# Altium PCB Arduino MEGA blank shield.pcbdoc
Units mm, origin at the board's own origin, x right, y up, seen from the top; angles counter-clockwise.
Board outline 100 x 115 mm, 2 copper layers (Top Layer, Bottom Layer); 11 components, 77 nets, 138 pads, 7 vias.
Unrouted connection lines stored in the file: 10.
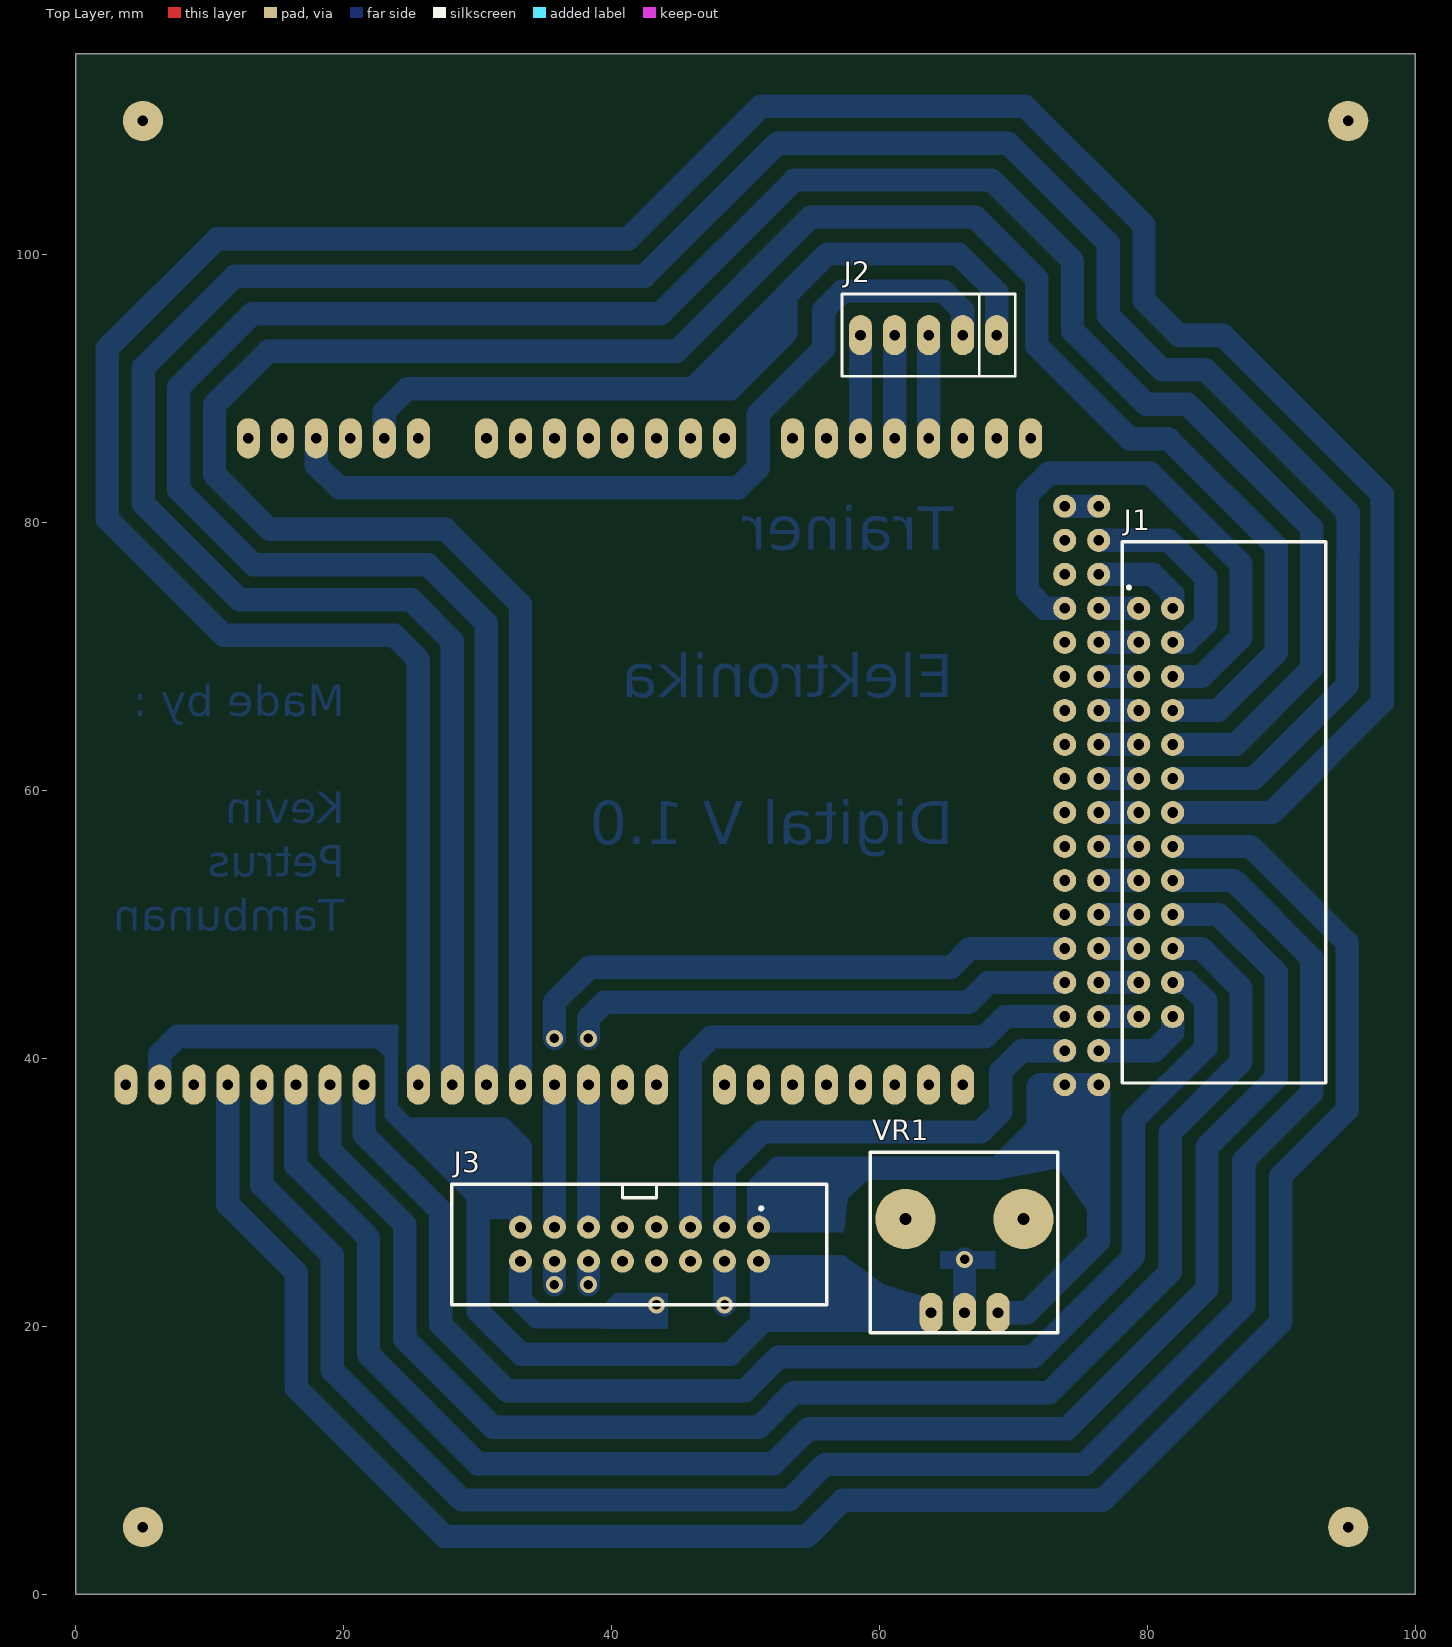
[diagram p0: Top Layer view]
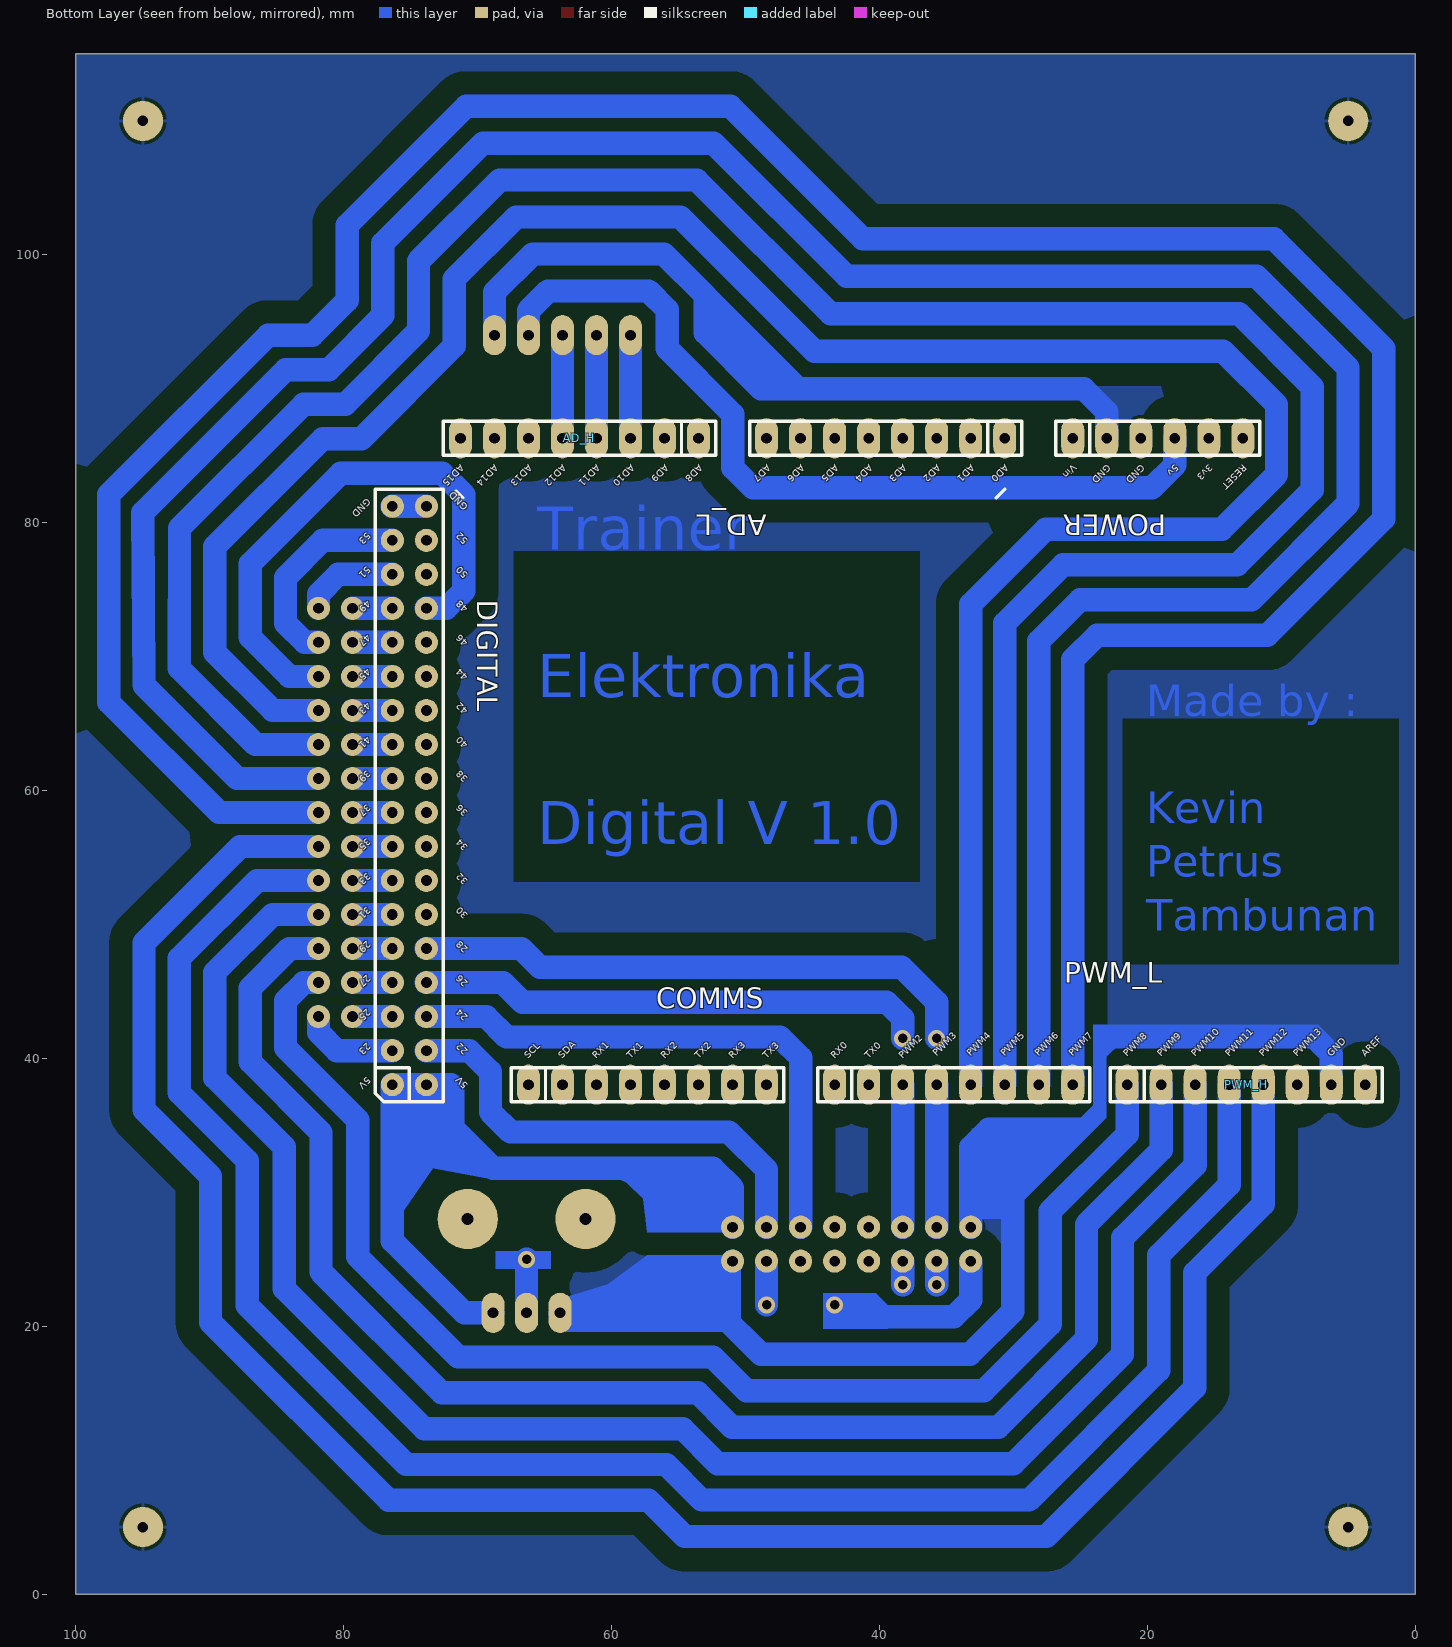
[diagram p1: Bottom Layer view, seen from below]
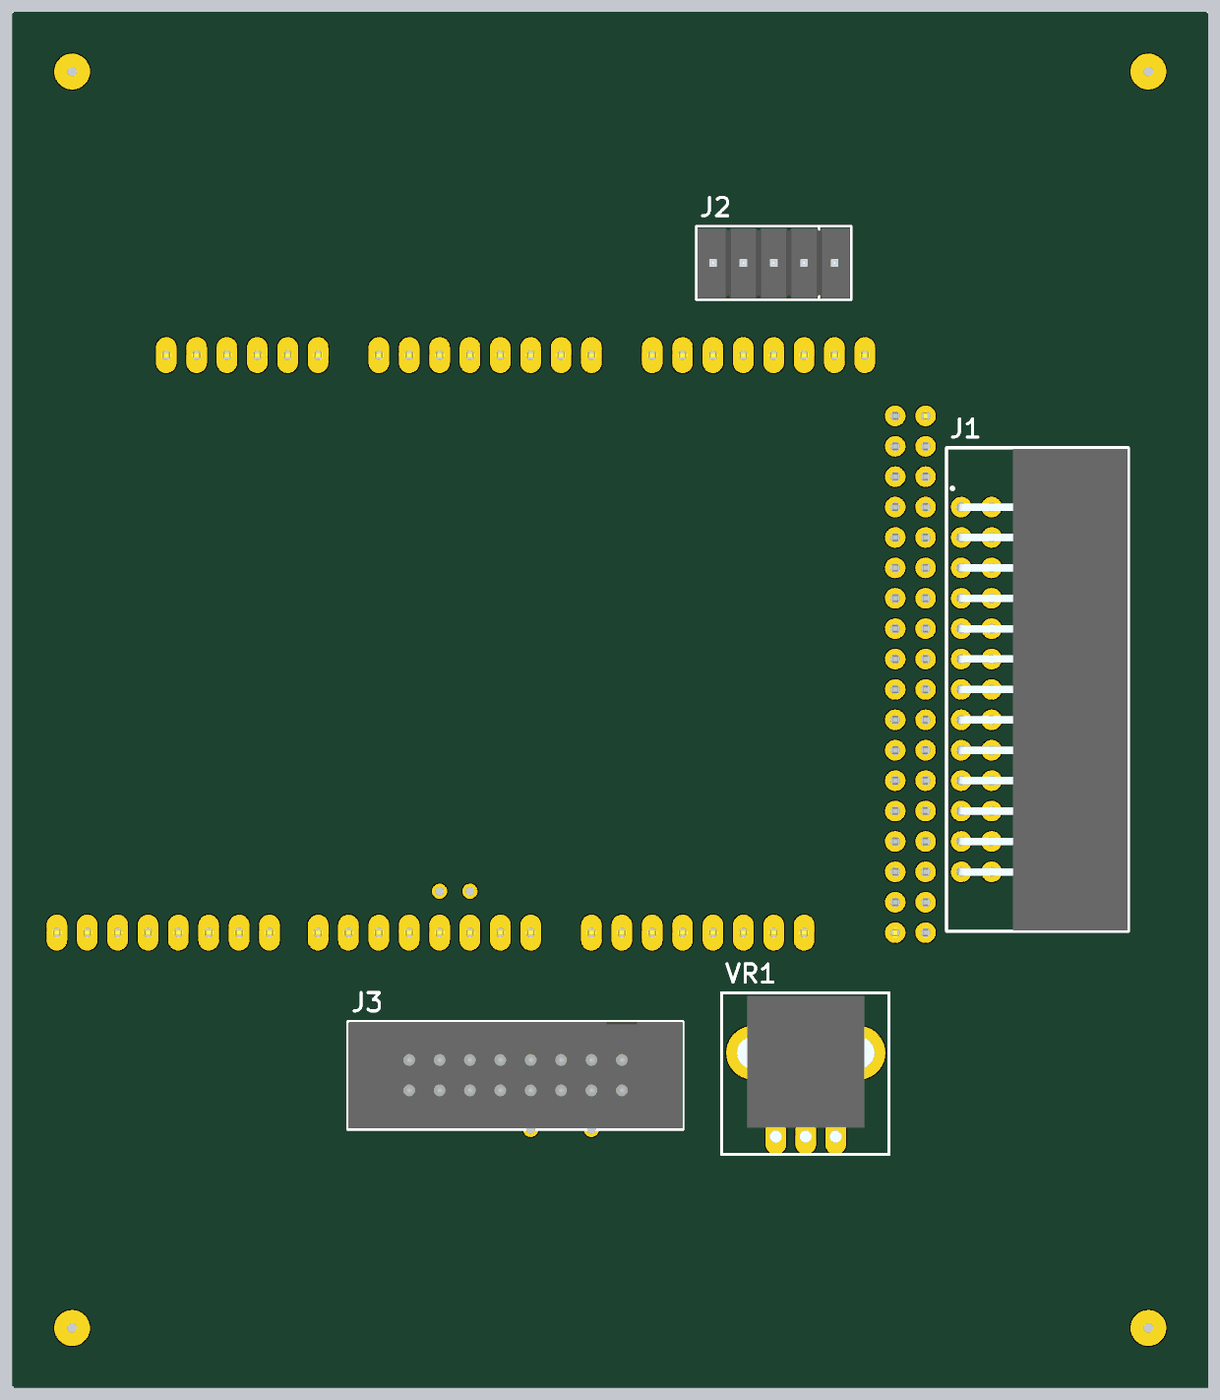
[diagram p2: 3D render of the assembled board from above, using the file's embedded part models]
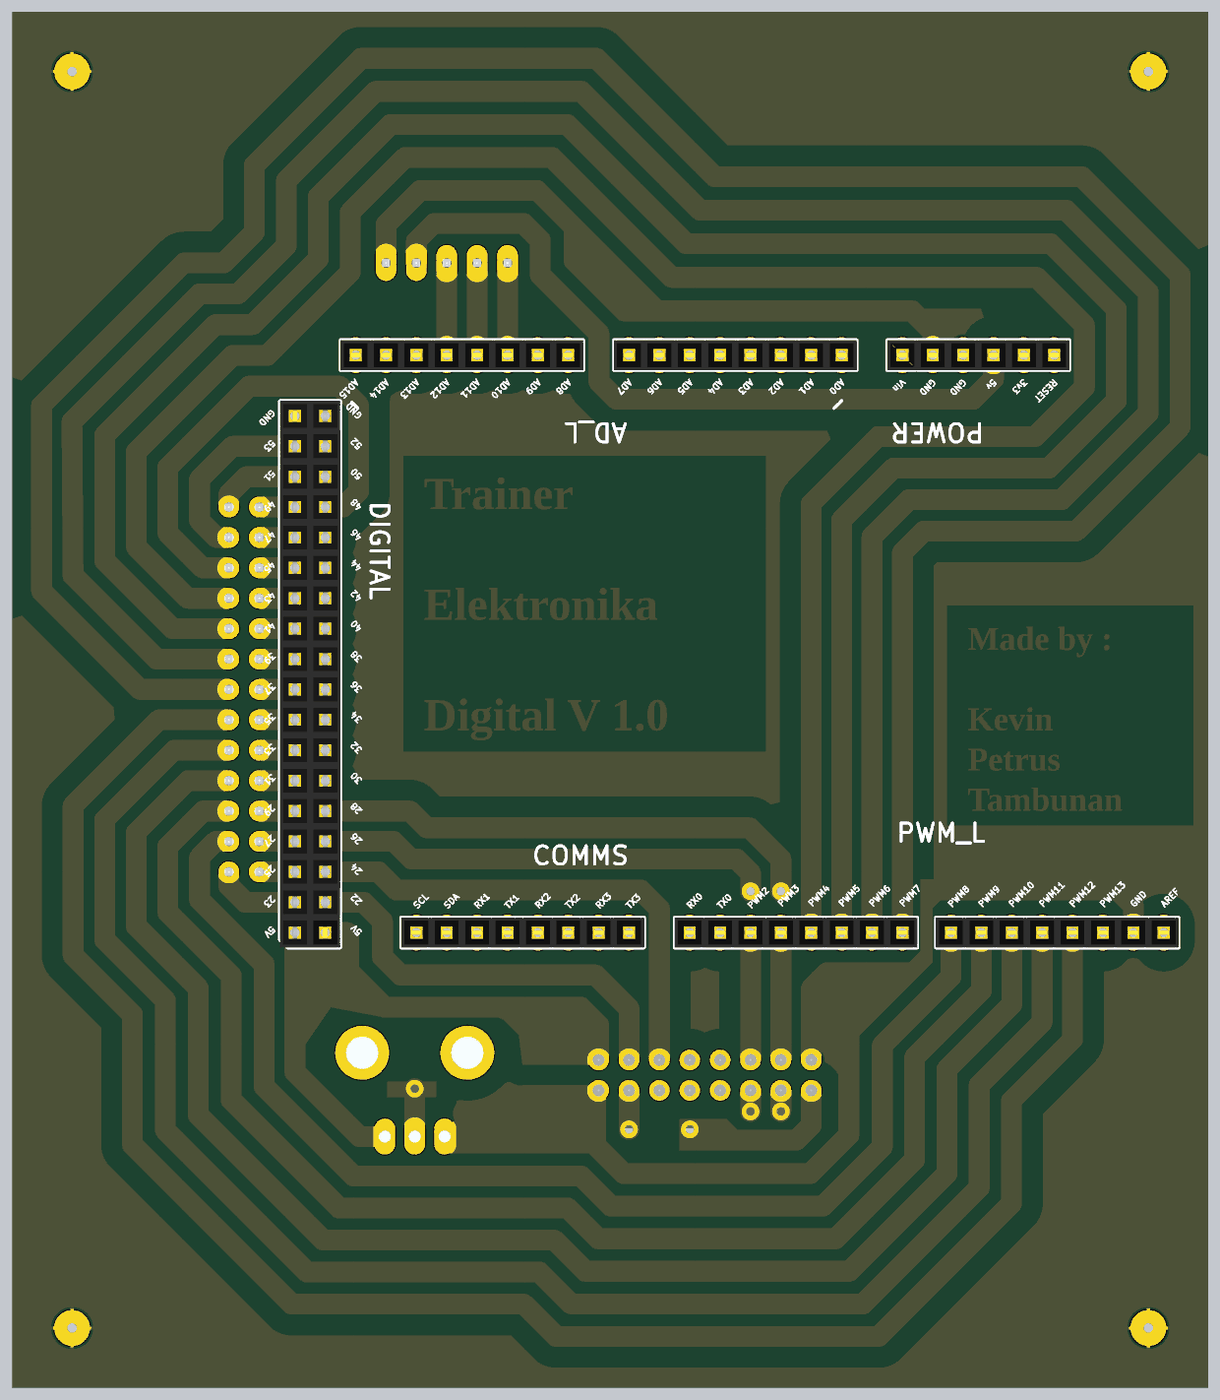
[diagram p3: 3D render of the assembled board from below, using the file's embedded part models]

## Layer stack, top to bottom
Top Solder: solder mask 0.0102, Solder Resist, Dk 3.5
Top Layer: signal copper 0.0356
Dielectric1: dielectric 0.32, FR-4, Dk 4.8
Bottom Layer: signal copper 0.0356
Bottom Solder: solder mask 0.0102, Solder Resist, Dk 3.5

## Board outline
0,0 0,115 100,115 100,0

## Design rules (kind name [scope] priority, off if disabled: settings)
Clearance [All] p1: gap=1.75 ignorepadtopadclearanceinfootprint=FALSE
PolygonConnect [All] p1: connectstyle=Relief reliefconductorwidth=0.254 reliefentries=4 polygonreliefangle="90 Angle" airgapwidth=0.254
RoutingVias [All] p1: holewidth=0.711 width=1.27 viastyle="Through Hole" minholewidth=0.711 minwidth=1.27 maxholewidth=0.711 maxwidth=1.27
SilkToSolderMaskClearance SilkscreenOverComponentPads [IsPad] p1: minsilkscreentomaskgap=0.254 clearancetoexposedcopper=TRUE
SolderMaskExpansion [All] p1: expansion=0.102
Width [All] p1: maxlimit=0.254 minlimit=0.254 preferedwidth=0.254
29 further rules are at their usual default settings.

## Components (designator, comment, footprint, x,y, rotation, side; value= is the part's Value field where it differs from the comment)
AD_H "AD_H" "HEADER 8X1 8.5MM" 53.51,86.3 r0 bottom locked
AD_L "AD_L" "HEADER 8X1 8.5MM" 30.65,86.3 r0 bottom locked
COMMS "Communication" "HEADER 8X1 8.5MM" 66.21,38.04 r180 bottom locked
DIGITAL "IO_36" "HEADER 36X 8MM" 76.37,38.04 r90 bottom locked
J1 "CONNECTOR_IO" SHDRRA26W62P254_2X13_4023X957X920P 80.62,58.36 r270 top locked
J2 "Rotary Encoder" HDRV5W64P0X254_1X5_1270X580X1205P 63.67,94 r0 top locked
J3 "LCD2002A_CONNECTOR" SHDR16W99P254_2X8_2794X889X947P 42.08,26.13 r180 top locked
POWER "POWER" "HEADER 6X1 8.5MM" 25.57,86.3 r180 bottom locked
PWM_H "PWM_H" "HEADER 8X1 8.5MM" 21.506,38.04 r180 bottom locked
PWM_L "PWM_L" "HEADER 8X1 8.5MM" 43.35,38.04 r180 bottom locked
VR1 "POT-5K" RV09AF4020KB10K 66.35,24.5 r0 top

## Footprints (in the part's own frame and the unit in brackets; to place one, negate y for a bottom-side part, rotate by r counter-clockwise, add the part's x,y. Pads: shape width x height; smd on the part's side, far side on the other; paste and mask are expansions set on the pad)
HDRV5W64P0X254_1X5_1270X580X1205P [mm]
  oval 1.72x3 hole 0.8: 1(5.08,0) 2(2.54,0) 3(0,0) 4(-2.54,0) 5(-5.08,0)
  silkscreen extent -6.48,-3.08 6.48,3.08, body extent -6.35,-2.9 6.35,2.9, height 12.05
"HEADER 6X1 8.5MM" [mm] "Stackable 6 pin header"
  oval 1.72x3 hole 0.8: 1(0,0) 2(2.54,0) 3(5.08,0) 4(7.62,0) 5(10.16,0) 6(12.7,0)
  silkscreen extent -1.27,-1.27 13.97,1.27, body extent -1.27,-1.27 13.97,1.27, height 8.5
"HEADER 8X1 8.5MM" [mm] "Stackable 8 pin header"
  oval 1.72x3 hole 0.8: 1(0,0) 2(2.54,0) 3(5.08,0) 4(7.62,0) 5(10.16,0) 6(12.7,0) 7(15.24,0) 8(17.78,0)
  silkscreen extent -1.27,-1.27 19.05,1.27, body extent -1.27,-1.27 19.05,1.27, height 8.5
"HEADER 36X 8MM" [mm] "Stackable 10 pin header"
  round 1.72 hole 0.8: 1(0,0) 2(0,-2.54) 3(2.54,0) 4(2.54,-2.54) 5(5.08,0) 6(5.08,-2.54) 7(7.62,0) 8(7.62,-2.54) 9(10.16,0) 10(10.16,-2.54) 11(12.7,0) 12(12.7,-2.54) 13(15.24,0) 14(15.24,-2.54) 15(17.78,0) 16(17.78,-2.54) 17(20.32,0) 18(20.32,-2.54) 19(22.86,-2.54) 20(22.86,0) 21(25.4,0) 22(25.4,-2.54) 23(27.94,0) 24(27.94,-2.54) 25(30.48,0) 26(30.48,-2.54) 27(33.02,0) 28(33.02,-2.54) 29(35.56,0) 30(35.56,-2.54) 31(38.1,0) 32(38.1,-2.54) 33(40.64,0) 34(40.64,-2.54) 35(43.18,0) 36(43.18,-2.54)
  silkscreen extent -1.27,-3.81 44.45,1.27, body extent -1.27,-3.81 44.45,1.27, height 8.5
RV09AF4020KB10K [mm]
  oval 1.74x3 hole 0.8: 1(-2.5,-3.5) 2(0,-3.5) 3(2.5,-3.5)
  round 4.5 hole 0.9: 4(-4.4,3.5) 5(4.4,3.5)
  silkscreen extent -7.04,-5 6.96,8.5, body extent -5.74,-4 5.75,8.25, height 10.1
SHDR16W99P254_2X8_2794X889X947P [mm]
  round 1.72 hole 0.8: 1(-8.89,-1.27) 2(-8.89,1.27) 3(-6.35,-1.27) 4(-6.35,1.27) 5(-3.81,-1.27) 6(-3.81,1.27) 7(-1.27,-1.27) 8(-1.27,1.27) 9(1.27,-1.27) 10(1.27,1.27) 11(3.81,-1.27) 12(3.81,1.27) 13(6.35,-1.27) 14(6.35,1.27) 15(8.89,-1.27) 16(8.89,1.27)
  silkscreen extent -13.99,-4.47 14.01,4.53, body extent -13.97,-4.44 13.97,4.45, height 9.47
SHDRRA26W62P254_2X13_4023X957X920P [mm]
  round 1.72 hole 0.8: 1(-15.24,-1.27) 2(-15.24,1.27) 3(-12.7,-1.27) 4(-12.7,1.27) 5(-10.16,-1.27) 6(-10.16,1.27) 7(-7.62,-1.27) 8(-7.62,1.27) 9(-5.08,-1.27) 10(-5.08,1.27) 11(-2.54,-1.27) 12(-2.54,1.27) 13(0,-1.27) 14(0,1.27) 15(2.54,-1.27) 16(2.54,1.27) 17(5.08,-1.27) 18(5.08,1.27) 19(7.62,-1.27) 20(7.62,1.27) 21(10.16,-1.27) 22(10.16,1.27) 23(12.7,-1.27) 24(12.7,1.27) 25(15.24,-1.27) 26(15.24,1.27)
  silkscreen extent -20.2,-2.5 20.2,12.7, body extent -20.11,-1.58 20.12,12.64, height 9.2

## Part data
AD_H PWM_L: Supplier Part Number 1=2698940, Supplier 1=Arrow, Supplier 2=Arrow, Supplier 3=Digi-Key, Supplier 4=Arrow, Supplier Part Number 2=2698939, Supplier Part Number 3=SAM1198-08-ND, Supplier Part Number 4=2698925
AD_L COMMS PWM_H: Supplier Part Number 1=SAM1198-08-ND, Supplier 1=Digi-Key, Supplier 2=Arrow, Supplier 3=Arrow, Supplier 4=Arrow
  AD_L: Supplier 5=Arrow, Supplier Part Number 2=2698939, Supplier Part Number 3=2698940, Supplier Part Number 4=43085273, Supplier Part Number 5=2698925
  COMMS PWM_H: Supplier Part Number 2=2698940, Supplier Part Number 3=2698939, Supplier Part Number 4=2698925
DIGITAL: Supplier Part Number 1=SAM1196-18-ND, Supplier 1=Digi-Key, Supplier 2=Arrow, Supplier 3=Arrow, Supplier 4=Arrow, Supplier 5=Arrow, Supplier Part Number 2=48117090, Supplier Part Number 3=46093326, Supplier Part Number 4=2698278, Supplier Part Number 5=2698268
J1: "Connector", Arrow Part Number=75867-105LF, Manufacturer_Name=Amphenol, Mouser Part Number=649-75867-105LF, Arrow Price/Stock=https://www.arrow.com/en/products/75867-105lf/amphenol-fci, Datasheet Link=https://cdn.amphenol-icc.com/media/wysiwyg/files/drawing/75867.pdf, Height=9.2mm, Manufacturer_Part_Number=75867-105LF, Mouser Price/Stock=https://www.mouser.com/Search/Refine.aspx?Keyword=649-75867-105LF
J2: library part 22-27-2051, "R_Encoder", Manufacturer_Name=Molex, Mouser Part Number=538-22-27-2051, Datasheet Link=https://www.mouser.com/datasheet/2/276/0022272051_PCB_HEADERS-227459.pdf, Height=12.05mm, Manufacturer_Part_Number=22-27-2051, Mouser Price/Stock=https://www.mouser.co.uk/ProductDetail/Molex/22-27-2051?qs=jBHU5RPckUr1HBbak%252BZx7g%3D%3D
J3: "Connector", Manufacturer_Name=Molex, Manufacturer_Part_Number=70246-1601, Mouser Part Number=538-70246-1601, Datasheet Link=https://www.molex.com/pdm_docs/sd/702461601_sd.pdf, Height=9.47mm, Mouser Price/Stock=https://www.mouser.com/Search/Refine.aspx?Keyword=538-70246-1601
POWER: Supplier Part Number 1=52553843, Supplier 1=Arrow, Supplier 2=Arrow, Supplier 3=Digi-Key, Supplier 4=Arrow, Supplier 5=Arrow, Supplier Part Number 2=2699075, Supplier Part Number 3=SAM1198-06-ND, Supplier Part Number 4=2699089, Supplier Part Number 5=2699088
VR1: library part RV09AF-40-20K-B10K, "Variable Resistor", Manufacturer_Name="Alpha (Taiwan)", Mouser Part Number=317-2090F-10K, Datasheet Link=https://www.mouser.com/datasheet/2/13/V09AF-1522357.pdf, Height=10mm, Manufacturer_Part_Number=RV09AF-40-20K-B10K, Mouser Price/Stock=https://www.mouser.co.uk/ProductDetail/Alpha-Taiwan/RV09AF-40-20K-B10K?qs=3S3d23pxJ3A%2FqCcmbiOtBw%3D%3D

## Free pads (board coordinates)
  round 3 hole 0.8: 6(5,5) 6(5,110) 7(95,5) 7(95,110)

## Via types
v1: diameter 1.27, hole 0.711, Top Layer to Bottom Layer, 7 vias

## Nets (pads, with @x,y where several pads share a name; then routed paths per layer and width w, separated by ;. In a path a pad name is that pad's centre, name@x,y a point inside that pad or via, vN(x,y) a via of type N, cw(c..) or ccw(c..) an arc to the next point about the centre after c; other vN are vias at no path point)
3V3: POWER.5
5V: DIGITAL.1 DIGITAL.2 J2.2 J3.1 J3.16 POWER.4 VR1.3 | length 132.2
  Bottom Layer w1.74: POWER.4 17.95,84.3 19.65,82.6 49.45,82.6 50.95,84.1 50.95,88.1 55.85,93 55.85,95.9 57.25,97.3 64.75,97.3 66.21,95.84 J2.2 ; J3.16 33.19,21.96 34.45,20.7 39.75,20.7 40.65,21.6 v1(43.35,21.6) ; J3.1 50.97,30.32 52.45,31.8 68.85,31.8 71.85,34.8 71.85,37.9 71.99,38.04 DIGITAL.2 DIGITAL.1 76.37,26.38 70.99,21 VR1.3
AD0: AD_L.1
AD1: AD_L.2
AD2: AD_L.3
AD3: AD_L.4
AD4: AD_L.5
AD5: AD_L.6
AD6: AD_L.7
AD7: AD_L.8
AD8: AD_H.1
AD9: AD_H.2
AD10: AD_H.3 J2.5 | length 7.7
  Bottom Layer w1.74: AD_H.3 J2.5
AD11: AD_H.4 J2.4 | length 7.7
  Bottom Layer w1.74: AD_H.4 J2.4
AD12: AD_H.5 J2.3 | length 7.7
  Bottom Layer w1.74: AD_H.5 J2.3
AD13: AD_H.6
AD14: AD_H.7
AD15: AD_H.8
AREF: PWM_H.8
BL: J3.4 VR1.2 | length 7.3
  Bottom Layer w1.74: v1(48.43,21.6) J3.4 ; VR1.2 v1(66.35,25)
GND: DIGITAL.35 DIGITAL.36 J2.1 J3.2 J3.6 J3.15 pad.6 pad.7 POWER.2 POWER.3 PWM_H.7 VR1.1 | length 157
  Bottom Layer w1: 22.25,41.6 23.55,40.3 23.55,36.3 25.15,34.7
  Bottom Layer w1.74: PWM_H.7 6.266,40.316 7.55,41.6 22.25,41.6 ; POWER.2 23.03,88.28 24.75,90 48.85,90 53.017,94.167 53.017,96.967 56.11,100.06 65.89,100.06 68.75,97.2 J2.1 ; 25.15,34.7 30.05,34.7 ; J3.15 33.19,33.36 31.85,34.7 30.05,34.7 ; J3.2 51.95,23.88 51.95,21 ; VR1.1@63.85,20.9 VR1.1 51.95,21 ; DIGITAL.36 DIGITAL.35 ; 30.05,34.7 30.05,21.1 33.25,17.9 48.85,17.9 51.95,21
IO22: DIGITAL.3 J1.26 | length 7.3
  Bottom Layer w1.74: DIGITAL.3 80.53,40.58 81.89,41.94 J1.26
IO23: DIGITAL.4 J3.3 | length 35.1
  Bottom Layer w1.74: J3.3 48.43,31.68 51.25,34.5 67.55,34.5 69.05,36 69.05,39 70.63,40.58 DIGITAL.4
IO24: DIGITAL.5 J1.25 | length 3
  Bottom Layer w1.74: DIGITAL.5 J1.25
IO25: DIGITAL.6 J3.5 | length 41.9
  Bottom Layer w1.74: J3.5 45.89,40.04 47.45,41.6 67.85,41.6 69.37,43.12 DIGITAL.6
IO26: DIGITAL.7 J1.23 | length 3
  Bottom Layer w1.74: DIGITAL.7 J1.23
IO27: DIGITAL.8 J3.12 | length 39.9
  Bottom Layer w1.74: v1(38.27,23.1) J3.12 ; v1(38.27,41.5) 38.27,43 39.47,44.2 66.65,44.2 68.11,45.66 DIGITAL.8
IO28: DIGITAL.9 J1.21 | length 3
  Bottom Layer w1.74: DIGITAL.9 J1.21
IO29: DIGITAL.10 J3.14 | length 44.2
  Bottom Layer w1.74: v1(35.73,23.1) J3.14 ; v1(35.73,41.5) 35.73,44.18 38.35,46.8 65.35,46.8 66.75,48.2 DIGITAL.10
IO30: DIGITAL.11 J1.19 | length 3
  Bottom Layer w1.74: DIGITAL.11 J1.19
IO31: DIGITAL.12
IO32: DIGITAL.13 J1.17 | length 3
  Bottom Layer w1.74: DIGITAL.13 J1.17
IO33: DIGITAL.14
IO34: DIGITAL.15 J1.15 | length 3
  Bottom Layer w1.74: DIGITAL.15 J1.15
IO35: DIGITAL.16
IO36: DIGITAL.17 J1.13 | length 3
  Bottom Layer w1.74: DIGITAL.17 J1.13
IO37: DIGITAL.18
IO38: DIGITAL.19
IO39: DIGITAL.20 J1.11 | length 3
  Bottom Layer w1.74: DIGITAL.20 J1.11
IO40: DIGITAL.21 J1.9 | length 3
  Bottom Layer w1.74: DIGITAL.21 J1.9
IO41: DIGITAL.22
IO42: DIGITAL.23 J1.7 | length 3
  Bottom Layer w1.74: DIGITAL.23 J1.7
IO43: DIGITAL.24
IO44: DIGITAL.25 J1.5 | length 3
  Bottom Layer w1.74: DIGITAL.25 J1.5
IO45: DIGITAL.26
IO46: DIGITAL.27 J1.3 | length 3
  Bottom Layer w1.74: DIGITAL.27 J1.3
IO47: DIGITAL.28
IO48: DIGITAL.29 J1.1 | length 3
  Bottom Layer w1.74: DIGITAL.29 J1.1
IO49: DIGITAL.30 J1.6 | length 41.7
  Bottom Layer w1.74: DIGITAL.30 72.35,73.6 71.05,74.9 71.05,82.1 72.65,83.7 80.23,83.7 86.99,76.94 86.99,71.44 84.07,68.52 J1.6
IO50: DIGITAL.31 J1.2 | length 7.2
  Bottom Layer w1.74: DIGITAL.31 80.41,76.14 81.89,74.66 J1.2
IO51: DIGITAL.32
IO52: DIGITAL.33 J1.4 | length 15.6
  Bottom Layer w1.74: DIGITAL.33 81.57,78.68 84.35,75.9 84.35,72.5 82.91,71.06 J1.4
IO53: DIGITAL.34
PWM2: J3.11 PWM_L.3 | length 10.6
  Bottom Layer w1.74: J3.11 PWM_L.3
PWM3: J3.13 PWM_L.4 | length 10.6
  Bottom Layer w1.74: J3.13 PWM_L.4
PWM4: J1.8 PWM_L.5 | length 183.6
  Bottom Layer w1.74: PWM_L.5 33.19,73.9 27.59,79.5 14.45,79.5 10.35,83.6 10.35,88.8 14.35,92.8 44.85,92.8 54.87,102.82 67.13,102.82 71.75,98.2 71.75,93.2 78.675,86.275 81.575,86.275 89.63,78.22 89.63,70.304 85.306,65.98 J1.8
PWM5: J1.10 PWM_L.6 | length 197.2
  Bottom Layer w1.74: PWM_L.6 30.65,72.5 26.283,76.867 13.283,76.867 7.683,82.467 7.683,90.133 13.15,95.6 43.65,95.6 53.63,105.58 68.37,105.58 74.417,99.533 74.417,94.333 79.9,88.85 83,88.85 92.271,79.579 92.274,69.124 86.59,63.44 J1.10
PWM6: J1.12 PWM_L.7 | length 210.9
  Bottom Layer w1.74: PWM_L.7 28.11,71.14 25.017,74.233 12.217,74.233 5.017,81.433 5.017,91.567 11.85,98.4 42.45,98.4 52.39,108.34 69.61,108.34 77.083,100.867 77.083,95.467 81.125,91.425 84.325,91.425 95.012,80.738 94.92,67.87 87.95,60.9 J1.12
PWM7: J1.14 PWM_L.8 | length 224.6
  Bottom Layer w1.74: PWM_L.8 25.57,69.78 23.75,71.6 11.05,71.6 2.35,80.3 2.35,93 10.55,101.2 41.25,101.2 51.15,111.1 70.85,111.1 79.75,102.2 79.75,96.6 82.35,94 85.65,94 97.55,82.1 97.55,66.6 89.31,58.36 J1.14
PWM8: J1.24 PWM_H.1 | length 102.5
  Bottom Layer w1.74: PWM_H.1 21.506,34.344 27.25,28.6 27.25,20.15 32.22,15.18 49.93,15.18 52.45,17.7 71.45,17.7 78.95,25.2 78.95,35.4 84.35,40.8 84.35,44.3 82.99,45.66 J1.24
PWM9: J1.22 PWM_H.2 | length 115.7
  Bottom Layer w1.74: PWM_H.2 18.966,33.184 24.55,27.6 24.55,19.05 31.14,12.46 51.01,12.46 53.575,15.025 72.675,15.025 81.7,24.05 81.7,34.45 86.991,39.741 86.991,45.259 84.05,48.2 J1.22
PWM10: J1.20 PWM_H.3 | length 129.1
  Bottom Layer w1.74: PWM_H.3 16.426,32.024 21.85,26.6 21.85,17.9 30.01,9.74 52.09,9.74 54.7,12.35 74,12.35 84.45,22.8 84.45,33.38 89.633,38.563 89.633,46.417 85.31,50.74 J1.20
PWM11: J1.18 PWM_H.4 | length 142.4
  Bottom Layer w1.74: PWM_H.4 13.886,30.564 19.15,25.3 19.15,16.7 28.83,7.02 53.27,7.02 55.925,9.675 75.325,9.675 87.2,21.55 87.2,32.35 92.274,37.424 92.274,47.476 86.47,53.28 J1.18
PWM12: J1.16 PWM_H.5 | length 155.9
  Bottom Layer w1.74: PWM_H.5 11.346,29.1 16.45,23.996 16.45,15.4 27.55,4.3 54.55,4.3 57.25,7 76.65,7 89.95,20.3 89.95,31.2 94.916,36.166 94.916,48.634 87.73,55.82 J1.16
PWM13: PWM_H.6
RESET: POWER.6
RX0: PWM_L.1
RX1: COMMS.3
RX2: COMMS.5
RX3: COMMS.7
SCL: COMMS.1
SDA: COMMS.2
TX0: PWM_L.2
TX1: COMMS.4
TX2: COMMS.6
TX3: COMMS.8
VIN: POWER.1
pads on no net: J3.7 J3.8 J3.9 J3.10 VR1.4 VR1.5

## Polygon pours and split planes (outlines as drawn)
GND on Bottom Layer "GND_L02_P000" (solid, pour order 0): 0,0 100,0 100,115 0,115

## Other copper
Bottom Layer:
  region net BL: 64.55,24.3 68.65,24.3 68.65,25.6 64.55,25.6
  region net 5V: 57.35,27 57.648,29.502 58.876,30.73 62.307,32.301 62.214,32.523 51.75,32.3 51.65,27
  region net GND: 50.35,25.3 57.35,25.3 60.273,23.121 63.45,22.15 63.45,19.6 50.35,19.6
  region net 5V: 51.582,27.566
  region net 5V: 69.15,31 73.35,31.8 75.55,28.6 76.614,37.7 71.75,37.7 71.65,37.6 71.65,34.046
  region net 5V: 39.393,19.83 44.206,19.83 44.206,22.47 40.283,22.47 39.393,21.58
  region net GND: 23.05,36.4 23.05,35.571 29.296,29.325 30.925,29.325 30.9,29.3 30.9,28.025 33.825,28.025 33.825,33.325 31.95,35.2 24.55,35.2 23.35,36.4
  region net GND: 55.65,100.8 45.65,90.8 45.65,89.4 48.75,89.4 53.45,94.1 53.45,97.6 56.15,100.3 55.65,100.8
  region net GND: 53.05,98.2
  region net GND: 24.05,40.3 24.05,42.5 7.25,42.5 5.55,40.8 23.25,40.8 23.75,40.3
  text "Trainer /  / Elektronika /  / Digital V 1.0" at 65.55,54.925 h5.5
  text "Made by : /  / Kevin  / Petrus / Tambunan" at 20.075,48.76 h4

## Silkscreen, mask and mechanical layers (free items; w line width, h text height)
Bottom Overlay:
  lines w0.254: 30.65,82.49 31.285,81.855 ; 71.11,81.855 71.613,82.357
  text "RESET" at 12.87,84.395 h0.51 r135
  text "3v3" at 15.41,84.395 h0.51 r135
  text "5v" at 17.95,84.395 h0.51 r135
  text "GND" at 20.49,84.395 h0.51 r135
  text "GND" at 23.03,84.395 h0.51 r135
  text "Vin" at 25.57,84.395 h0.51 r135
  text "AD0" at 30.65,84.395 h0.51 r135
  text "AD1" at 33.19,84.395 h0.51 r135
  text "AD2" at 35.73,84.395 h0.51 r135
  text "AD3" at 38.27,84.395 h0.51 r135
  text "AD4" at 40.81,84.395 h0.51 r135
  text "AD5" at 43.35,84.395 h0.51 r135
  text "AD6" at 45.89,84.395 h0.51 r135
  text "AD7" at 48.43,84.395 h0.51 r135
  text "AD8" at 53.51,84.395 h0.51 r135
  text "AD9" at 56.05,84.395 h0.51 r135
  text "AD10" at 58.59,84.395 h0.51 r135
  text "AD11" at 61.13,84.395 h0.51 r135
  text "AD12" at 63.67,84.395 h0.51 r135
  text "AD13" at 66.21,84.395 h0.51 r135
  text "AD14" at 68.75,84.395 h0.51 r135
  text "AD15" at 71.29,84.395 h0.51 r135
  text "GND" at 78.275,81.855 h0.51 r135
  text "GND" at 70.655,81.22 h0.51 r225
  text "53" at 78.275,79.315 h0.51 r135
  text "52" at 70.655,78.68 h0.51 r225
  text "51" at 78.275,76.775 h0.51 r135
  text "50" at 70.655,76.14 h0.51 r225
  text "49" at 78.275,74.235 h0.51 r135
  text "48" at 70.655,73.6 h0.51 r225
  text "47" at 78.275,71.695 h0.51 r135
  text "46" at 70.655,71.06 h0.51 r225
  text "45" at 78.275,69.155 h0.51 r135
  text "44" at 70.655,68.52 h0.51 r225
  text "43" at 78.275,66.615 h0.51 r135
  text "42" at 70.655,65.98 h0.51 r225
  text "41" at 78.275,64.075 h0.51 r135
  text "40" at 70.655,63.44 h0.51 r225
  text "39" at 78.275,61.535 h0.51 r135
  text "38" at 70.655,60.9 h0.51 r225
  text "37" at 78.275,58.995 h0.51 r135
  text "36" at 70.655,58.36 h0.51 r225
  text "35" at 78.275,56.455 h0.51 r135
  text "34" at 70.655,55.82 h0.51 r225
  text "33" at 78.275,53.915 h0.51 r135
  text "32" at 70.655,53.28 h0.51 r225
  text "31" at 78.275,51.375 h0.51 r135
  text "30" at 70.655,50.74 h0.51 r225
  text "29" at 78.275,48.835 h0.51 r135
  text "28" at 70.655,48.2 h0.51 r225
  text "27" at 78.275,46.295 h0.51 r135
  text "26" at 70.655,45.66 h0.51 r225
  text "25" at 78.275,43.755 h0.51 r135
  text "24" at 70.655,43.12 h0.51 r225
  text "23" at 78.275,41.215 h0.51 r135
  text "22" at 70.655,40.58 h0.51 r225
  text "PWM7" at 25.57,40.125 h0.51 r315
  text "PWM6" at 28.11,40.125 h0.51 r315
  text "PWM5" at 30.65,40.125 h0.51 r315
  text "PWM4" at 33.19,40.125 h0.51 r315
  text "PWM3" at 35.73,40.125 h0.51 r315
  text "AREF" at 3.726,40.072 h0.51 r315
  text "GND" at 6.266,40.072 h0.51 r315
  text "PWM13" at 8.806,40.072 h0.51 r315
  text "PWM12" at 11.346,40.072 h0.51 r315
  text "PWM11" at 13.886,40.072 h0.51 r315
  text "PWM10" at 16.426,40.072 h0.51 r315
  text "PWM9" at 18.966,40.072 h0.51 r315
  text "PWM8" at 21.506,40.072 h0.51 r315
  text "PWM2" at 38.27,39.945 h0.51 r315
  text "TX0" at 40.81,39.945 h0.51 r315
  text "RX0" at 43.35,39.945 h0.51 r315
  text "TX3" at 48.43,39.945 h0.51 r315
  text "RX3" at 50.97,39.945 h0.51 r315
  text "TX2" at 53.51,39.945 h0.51 r315
  text "RX2" at 56.05,39.945 h0.51 r315
  text "TX1" at 58.59,39.945 h0.51 r315
  text "RX1" at 61.13,39.945 h0.51 r315
  text "SDA" at 63.67,39.945 h0.51 r315
  text "SCL" at 66.21,39.945 h0.51 r315
  text "5V" at 78.275,38.675 h0.51 r135
  text "5V" at 70.655,38.04 h0.51 r225
Bottom Solder:
  circle w0.254: c5,5 r1.5
Mechanical 1:
  lines w0.127: -20.15,35.5 -20.15,88.84 78.91,88.84 78.91,87.57 81.45,85.03 81.45,50.74 78.91,48.2 78.91,45.66 78.91,40.58 78.91,38.04 76.37,35.5 -20.15,35.5
  lines w0.254: 0,0 0,35.5 ; 0,88.84 0,115

## Dimensions
0,115 to 100,115 on Top Overlay
0,115 to 0,0 on Top Overlay